# Altium PCB BopIt.PcbDoc
Units mil, origin at the board's own origin, x right, y up, seen from the top; angles counter-clockwise.
Board outline 3170 x 1700 mil, 2 copper layers (Top Layer, Bottom Layer); 13 components, 7 nets, 53 pads, 0 vias.
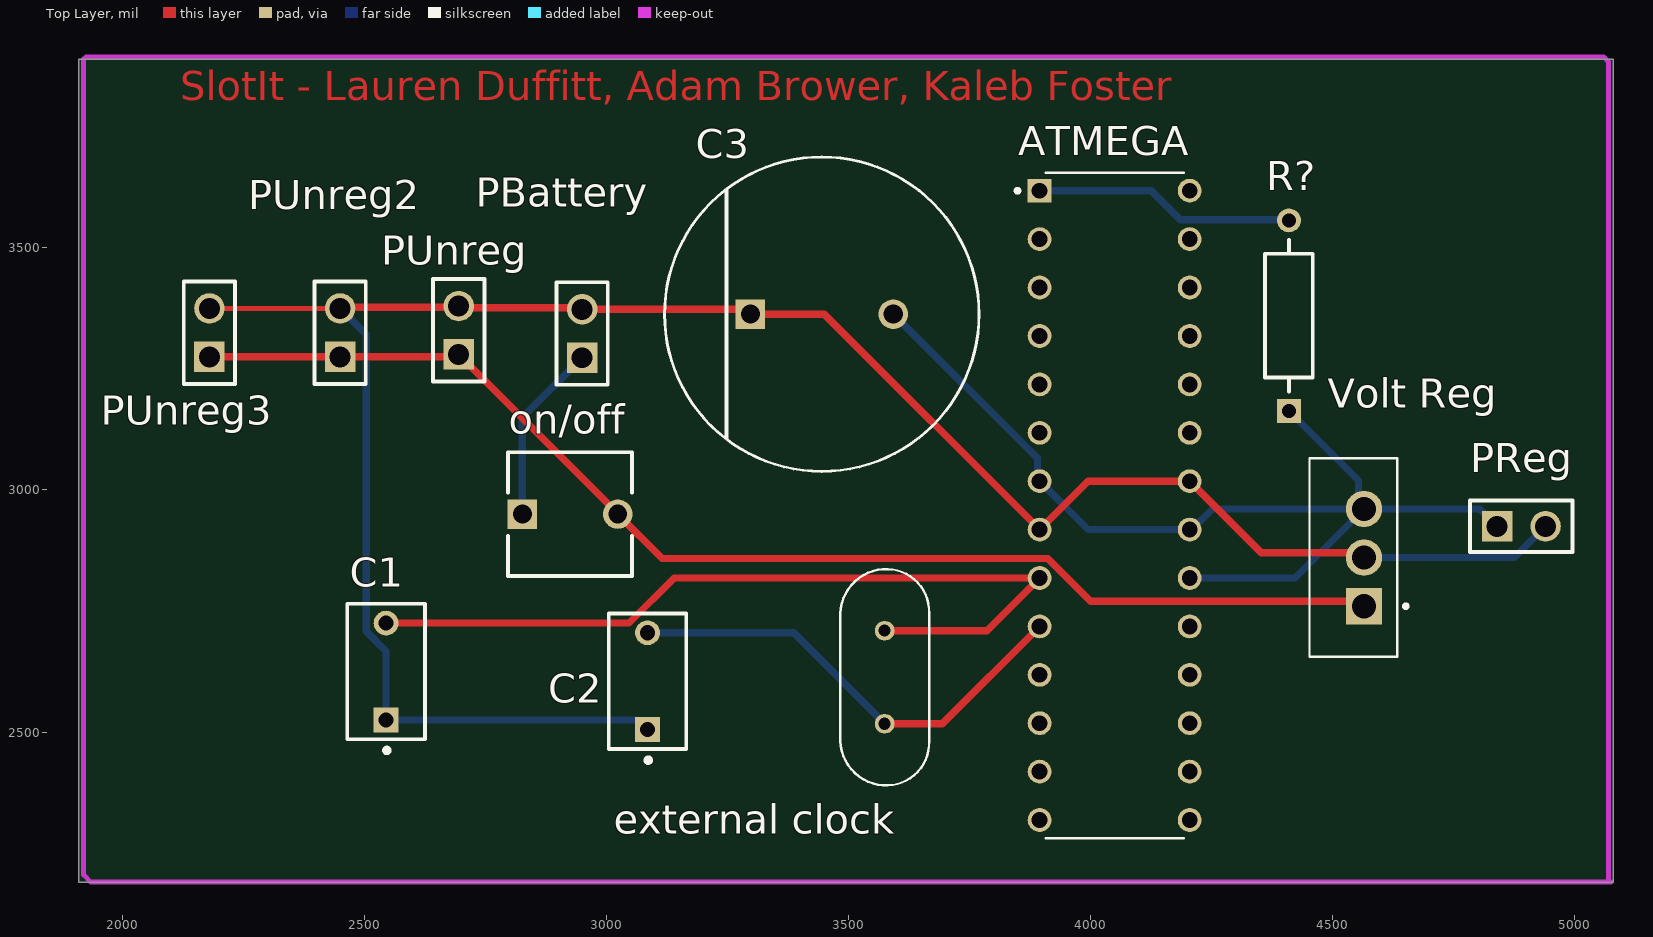
[diagram p0: Top Layer view]
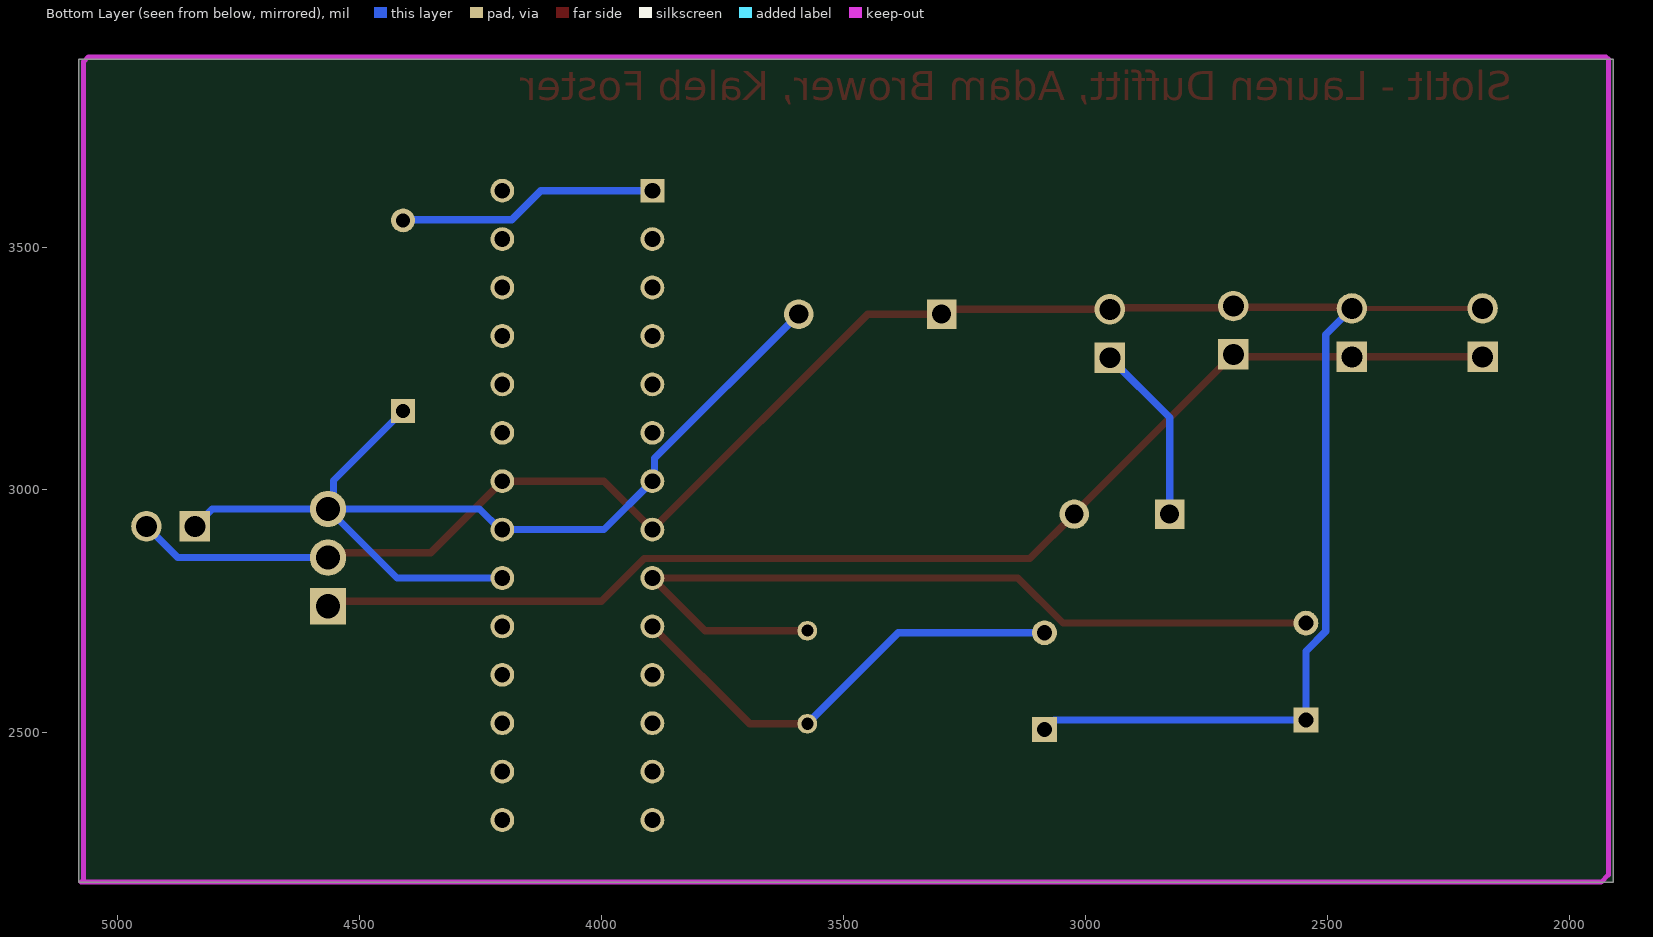
[diagram p1: Bottom Layer view, seen from below]
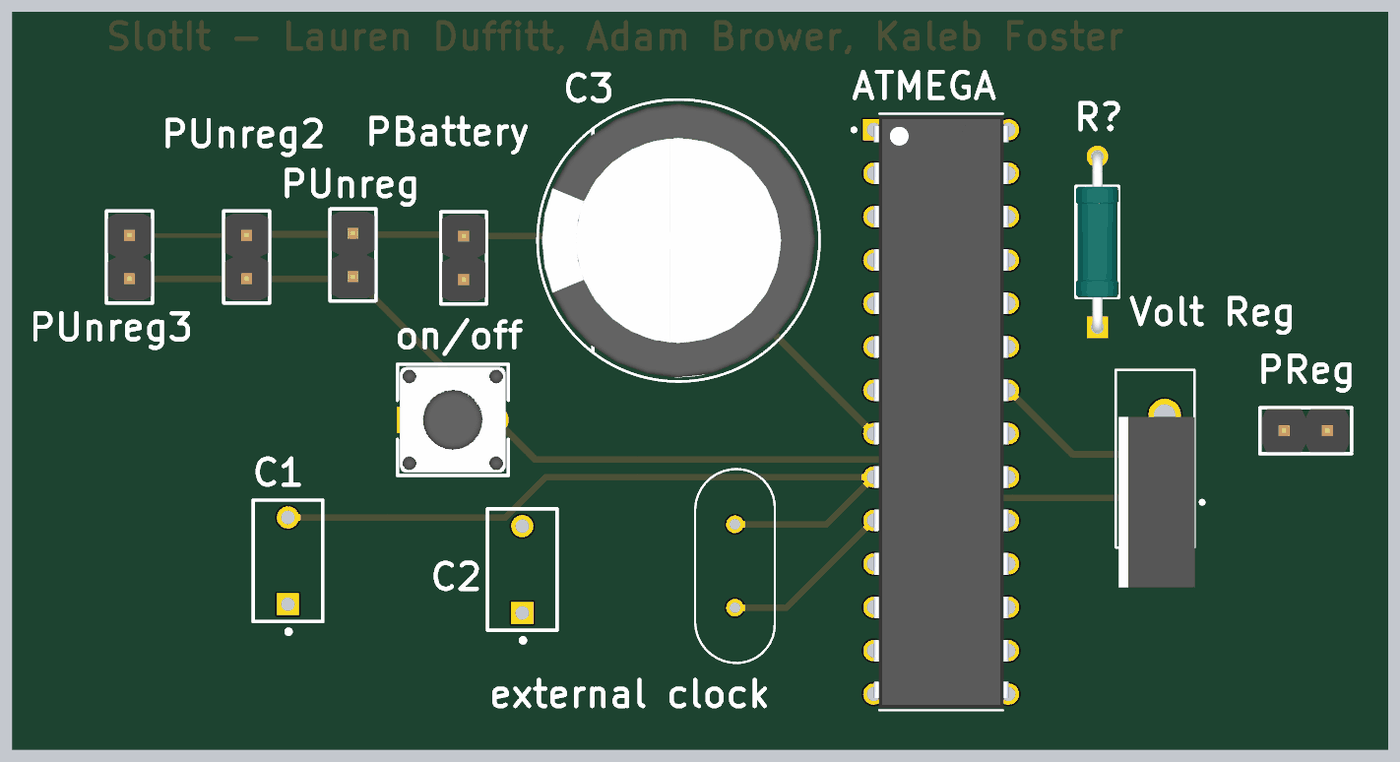
[diagram p2: 3D render of the assembled board from above, using the file's embedded part models]

## Layer stack, top to bottom
Top Solder: solder mask 0.4, Solder Resist, Dk 3.5
Top Layer: signal copper 1.4
Dielectric 1: dielectric 12.6, FR-4, Dk 4.8
Bottom Layer: signal copper 1.4
Bottom Solder: solder mask 0.4, Solder Resist, Dk 3.5

## Board outline
1910,2190 5080,2190 5080,3890 1910,3890

## Design rules (kind name [scope] priority, off if disabled: settings)
BoardOutlineClearance [All] p1: gap=7.87 ignorepadtopadclearanceinfootprint=FALSE except(15.75: Arc-SplitBarrior Arc-SplitContinuation Track-SplitBarrior Track-SplitContinuation SMDPad-SplitBarrior SMDPad-SplitContinuation THPad-SplitBarrior THPad-SplitContinuation Via-SplitBarrior Via-SplitContinuation Fill-SplitBarrior Fill-SplitContinuation Poly-SplitBarrior Poly-SplitContinuation Region-SplitBarrior Region-SplitContinuation Text-SplitBarrior Text-SplitContinuation)
Clearance "Clearance Bottom Layer" [OnLayer('Bottom Layer')] p1: gap=8 ignorepadtopadclearanceinfootprint=TRUE except(10: Arc-Text Track-Text SMDPad-Text THPad-Text Via-Text Fill-Text Poly-Text Region-Text Text-Text)
Clearance "Clearance Top Layer" [OnLayer('Top Layer')] p2: gap=8 ignorepadtopadclearanceinfootprint=TRUE except(10: Arc-Text Track-Text SMDPad-Text THPad-Text Via-Text Fill-Text Poly-Text Region-Text Text-Text)
Clearance [All] p3: gap=7.87 ignorepadtopadclearanceinfootprint=FALSE except(3.5: Arc-Arc Arc-Track Arc-SMDPad Track-Track Track-SMDPad SMDPad-SMDPad; 5: Arc-Via Track-Via SMDPad-Via THPad-Via Via-Via; 10: Arc-Text Track-Text SMDPad-Text THPad-Text Via-Text Fill-Text Poly-Text Region-Text Text-Text)
HoleSize [All] p1: absolutevalues=TRUE maxlimit=248.03 minlimit=7.87 maxpercent=80.000 minpercent=20.000
MinimumAnnularRing [All] p1: minimumring=3
MinimumSolderMaskSliver [All] p1: minsoldermaskwidth=3.94
PolygonConnect PolygonConnect_1 [All] p1: thpad.connectstyle=Relief thpad.reliefconductorwidth=20 thpad.reliefentries=4 thpad.polygonreliefangle="90 Angle" thpad.airgapwidth=10 smdpad.connectstyle=Relief smdpad.reliefconductorwidth=20 smdpad.reliefentries=4 smdpad.polygonreliefangle="90 Angle" smdpad.airgapwidth=10 via.connectstyle=Direct via.reliefconductorwidth=20 via.reliefentries=4 via.polygonreliefangle="90 Angle" via.airgapwidth=10
RoutingCorners [All] p1: cornerstyle=Round minsetback=100 maxsetback=100
RoutingVias [All] p1: holewidth=19.68 width=39.37 viastyle="Through Hole" minholewidth=7.87 minwidth=17.72 maxholewidth=39.37 maxwidth=78.74
SilkToSilkClearance [All] p1: silktosilkclearance=3.94
SilkToSolderMaskClearance [IsPad] p1: minsilkscreentomaskgap=3.94 clearancetoexposedcopper=TRUE
SolderMaskExpansion [All] p1: expansion=4 istentingtop=FALSE
Width [All] p1: maxlimit=100 minlimit=3.5 preferedwidth=15
25 further rules are at their usual default settings.

## Components (designator, comment, footprint, x,y, rotation, side; value= is the part's Value field where it differs from the comment)
ATMEGA "ATMEGA328-PU" DIP787W46P254L3467H508Q28 4050,2968.15 r0 top
C1 "C330C105M5U5TA" KEMT-C330C105M5U5TA 2545,2625 r90 top
C2 "C330C105M5U5TA" KEMT-C330C105M5U5TA 3085,2605 r90 top
C3 "EEUFC1A332S" FP-RAD-TH-D_16_0_5-L_20_2-MFG 3445,3363.15 r0 top
"external clock" "ECS-240.0001-18-1X" XTAL_ECS-200-20-1X 3575,2613.15 r90 top
on/off "FSM4JRT" FP-FSM4JRT-MFG 2925,2950 r0 top
PBattery "61300211121" 61300211121 2950,3323.15 r90 top
PReg "61300211121" 61300211121 4890,2925 r0 top
PUnreg "61300211121" 61300211121 2695,3330 r90 top
PUnreg2 "61300211121" 61300211121 2450,3325 r90 top
PUnreg3 "61300211121" 61300211121 2180,3325 r90 top
R? "MRS25000C1001FCT00" FP-MRS25-MFG 4410,3360 r90 top
"Volt Reg" "L7805CV" TO255P1040X460X1968-3 4565,2760 r90 top

## Footprints (in the part's own frame and the unit in brackets; to place one, negate y for a bottom-side part, rotate by r counter-clockwise, add the part's x,y. Pads: shape width x height; smd on the part's side, far side on the other; paste and mask are expansions set on the pad)
61300211121 [mm] "Pin Header, pitch 2.54 mm, THT, Vertical, single row, 2p"
  rect 1.6x1.6 hole 1.1: 1(-1.27,0)
  round 1.6 hole 1.1: 2(1.27,0)
  silkscreen extent -2.69,-1.35 2.69,1.35, body extent -2.54,-1.27 2.54,1.27, height 8.57
DIP787W46P254L3467H508Q28 [mm]
  rect 1.25x1.25 hole 0.83: 1(-3.937,16.51)
  round 1.25 hole 0.83: 2(-3.937,13.97) 3(-3.937,11.43) 4(-3.937,8.89) 5(-3.937,6.35) 6(-3.937,3.81) 7(-3.937,1.27) 8(-3.937,-1.27) 9(-3.937,-3.81) 10(-3.937,-6.35) 11(-3.937,-8.89) 12(-3.937,-11.43) 13(-3.937,-13.97) 14(-3.937,-16.51) 15(3.937,-16.51) 16(3.937,-13.97) 17(3.937,-11.43) 18(3.937,-8.89) 19(3.937,-6.35) 20(3.937,-3.81) 21(3.937,-1.27) 22(3.937,1.27) 23(3.937,3.81) 24(3.937,6.35) 25(3.937,8.89) 26(3.937,11.43) 27(3.937,13.97) 28(3.937,16.51)
  silkscreen extent -5.2,-17.45 3.62,17.45, body extent -3.95,-17.34 3.95,17.34, height 4.57
FP-FSM4JRT-MFG [mil]
  rect 60.65x60.65 hole 39 paste-39370.1 mask+0: 1(-98.5,0)
  round 60.65 hole 39 paste-39370.1 mask+0: 2(98.5,0)
  silkscreen extent -128,-128 128,128, body extent -133,-132 133,132, height 10
FP-MRS25-MFG [mm]
  rect 1.25x1.25 hole 0.75 paste-1000 mask+0: 1(-5,0)
  round 1.25 hole 0.75 paste-1000 mask+0: 2(5,0)
  silkscreen extent -3.98,-1.25 3.98,1.25, body extent -5.72,-1.35 5.72,1.35, height 0.25
FP-RAD-TH-D_16_0_5-L_20_2-MFG [mm]
  rect 1.55x1.55 hole 1 paste-1000 mask+0: 1(-3.75,0)
  round 1.55 hole 1 paste-1000 mask+0: 2(3.75,0)
  silkscreen extent -8.25,-8.25 8.25,8.25, body extent -8.35,-8.35 8.35,8.35, height 0.25
KEMT-C330C105M5U5TA [mm] "THD, 2-Leads, Body 7.11x4.07mm"
  rect 1.3x1.3 hole 0.8: 1(-2.54,0)
  round 1.3 hole 0.8: 2(2.54,0)
  silkscreen extent -4.27,-2.03 3.55,2.03, body extent -3.55,-2.03 3.55,2.03, height 9.14
TO255P1040X460X1968-3 [mm]
  rect 1.91x1.91 / inner round 1.91 / far side rect 1.91x1.91 hole 1.27: 1(0,0)
  round 1.91 hole 1.27: 2(2.55,0) 3(5.1,0)
  silkscreen extent -2.65,-2.29 7.75,2.86, body extent -4.98,-1.76 4.98,2.69, height 19.68
XTAL_ECS-200-20-1X [mm]
  round 1.03 hole 0.63: 1(-2.44,0) 2(2.44,0)
  silkscreen extent -5.68,-2.33 5.68,2.33

## Part data
ATMEGA: "AVR AVRÂ® ATmega Microcontroller IC 8-Bit 20MHz 32KB (16K x 16) FLASH 28-PDIP", Package="DIP-28 Microchip Technology", Availability="In Stock", Check_prices=https://www.snapeda.com/parts/ATMEGA328-PU/Microchip/view-part/?ref=eda, MF="Microchip Technology", MP=ATMEGA328-PU, Price=None, Purchase-URL=https://pricing.snapeda.com/search/part/ATMEGA328-PU/?ref=eda, SnapEDA_Link=https://www.snapeda.com/parts/ATMEGA328-PU/Microchip/view-part/?ref=snap
C1 C2: library part CMP-2000-06056-1, "Ceramic Capacitor, 1 uF, +/- 20%, 50 V, -10 to 85 degC, 2-Pin THD, RoHS, Bulk", Capacitance=1µF, Manufacturer=Kemet, Operating Temperature=10°C~85°C, Package / Case=Radial, Package Description="2-Pin Through Hole Device, Body 7.11 x 4.07 mm", Ratings=-, Standard Package=250, Temperature Coefficient=Z5U, Tolerance=±20%, Voltage - Rated=50V, Applications=GeneralPurpose, Catalog Drawings=C330(std), Category=Capacitors, Datasheet URL=http://www.kemet.com/Lists/ProductCatalog/Attachments/599/KEM_C1051_GOLDMAX_Z5U.pdf, Datasheet Version=12/2015, Family=CeramicCapacitors, Features=-, Height - Seated (Max)="0.360\"(9.14mm)", Lead Spacing="0.200\"(5.08mm)", Lead Style=Straight, Manufacturer URL=http://www.kemet.com/, Mounting Technology=ThroughHole, Mounting Type=ThroughHole, Online Catalog=GoldenMax™Series, Other Names=399-4390, Package Reference=C330C105M5U5TA, Packaging=Bulk, PCN Design/Specification=C3yySeriesGoldenMaxLeadConfiguration02/Feb/2015, Product Training Modules=CapacitorBasics-TypicalUsesforCapacitors, Series=GoldenMax™, Size / Dimension="0.300\"Lx0.150\"W(7.62mmx3.81mm)", Thickness (Max)=-
C3: library part CMP-05427-000988-1, "Aluminum Electrolytic Capacitors (Radial Lead Type) AEC-Q200 Qualified 3300uF ±20% 10V", Capacitance=3.3mF, Case/Package=Radial, ESR (Equivalent Series Resistance)=29mR, Leakage Current=3uA, Max Operating Temperature=105°C, Min Operating Temperature=-55°C, Package Quantity=100, Ripple Current=2.205A, Tolerance=20%, Voltage=10V, Construction=RADIAL, Diameter=16mm, Dissipation Factor=0.19%, Height=20mm, Height - Seated (Max)=0.787inch, Impedance=29mR, Lead Diameter=0.8mm, Lead Free="Lead Free", Lead Pitch=7.5mm, Length=20mm, Life (Hours)=5000Hour, Mount="Through Hole", Packaging=Bulk, Polarity=Polar, Radiation Hardening=No, RoHS Compliant=Yes, Series=FC, Termination=Radial, Voltage Rating=10V, Voltage Rating (DC)=10V
"external clock": "Crystals / Oscillators / Resonators 24.00014MHz 18pF", Package="HC49/U ECS International", Availability=Unavailable, MF="ECS International", MP=ECS-240.0001-18-1X, Price=None, SnapEDA_Link=https://www.snapeda.com/parts/ECS-240.0001-18-1X/ECS%20International/view-part/259232/?ref=snap
on/off: library part CMP-03407-000038-1, "SWITCH TACTILE SPST-NO 0.05A 24V", Case/Package=Radial, Contact Current Rating=50mA, Contact Resistance=100mR, Max Operating Temperature=105°C, Max Voltage Rating (DC)=12V, Min Operating Temperature=-35°C, Operating Force=1.57N, Package Quantity=10000, Actuator Diameter=3.5mm, Actuator Length=0.055inch, Actuator Material=Resin, Actuator Type=Standard, Contact Material="Copper Alloy", Contact Plating=Silver, Current Rating=50mA, Depth=6.19mm, Electrical Life=100000Cycles, Illumination Type=Non-Illuminated, Length=6.19mm, Max Current Rating=50mA, Mechanical Life=100000Cycles, Mount="Through Hole", Orientation=Straight, Packaging="Tape and Reel", Radiation Hardening=No, RoHS Compliant=Yes, Series=FSMJRT, Switch Function=Off-Mom, Switch Travel=0.25mm, Termination="PC Pins", Throw Configuration=SPST, Type=Switch, Voltage Rating (DC)=12V
PBattery PReg PUnreg PUnreg2 PUnreg3: library part CMP-1712-00002-4, "THT Vertical Pin Header WR-PHD, Pitch 2.54 mm, Single Row, 2 pins", Contact Resistance=20mOhm, Manufacturer="Wurth Elektronik", Operating Temperature=-40to105degC, Rated Current=3A, Withstanding Voltage=500VAC, Working Voltage=250VAC, Datasheet URL=https://katalog.we-online.de/em/datasheet/6130xx11121.pdf, Gender=Male, Manufacturer URL=http://www.we-online.de, Mounting Technology=THT, Orientation=Vertical, Package Reference=61300211121, Packaging=Bag, Part Number=61300211121, Pin Number=2, Pitch=2.54mm, Publisher=WurthElektronik, Row Number=Single
R?: library part CMP-02408-000051-1, "RES 1K OHM 0.6W 1% AXIAL", Case/Package=Axial, Max Operating Temperature=155°C, Max Power Dissipation=600mW, Min Operating Temperature=-55°C, Package Quantity=5000, Resistance=1kR, Resistance Tolerance=1%, Resistor Type="Metal Film", Temperature Coefficient=50ppm/°C, Voltage Rating=350V, Construction=Cylindrical, Contact Plating=Tin, Diameter=2.5mm, Lead Diameter=0.6mm, Lead Free="Lead Free", Length=6.5mm, Military Standard=Not, Mount="Through Hole", Number of Pins=2, Number of Terminations=2, Packaging="Tape and Reel", Power Rating=600mW, Radiation Hardening=No, RoHS Compliant=Yes, Series=MRS25, Technology="THIN FILM", Termination=Axial, Tolerance=1%, Voltage Rating (DC)=350V, Weight=0.00776oz, Width=2.5mm
"Volt Reg": "Linear Voltage Regulator IC Positive Fixed 1 Output 1.5A TO-220", Package="TO-220-3 ON Semiconductor", Availability="In Stock", Check_prices=https://www.snapeda.com/parts/L7805CV/STMicroelectronics/view-part/?ref=eda, MF=STMicroelectronics, MP=L7805CV, Price=None, Purchase-URL=https://pricing.snapeda.com/search/part/L7805CV/?ref=eda, SnapEDA_Link=https://www.snapeda.com/parts/L7805CV/STMicroelectronics/view-part/?ref=snap

## Nets (pads, with @x,y where several pads share a name; then routed paths per layer and width w, separated by ;. In a path a pad name is that pad's centre, name@x,y a point inside that pad or via, vN(x,y) a via of type N, cw(c..) or ccw(c..) an arc to the next point about the centre after c; other vN are vias at no path point)
NetATMEGA_1: ATMEGA.1 R?.2 | length 540.4
  Bottom Layer w15: ATMEGA.1 4125.77,3618.15 4185.67,3558.26 4408.59,3558.26 R?.2
NetATMEGA_7: "Volt Reg.3" ATMEGA.7 ATMEGA.20 ATMEGA.21 C3.2 PReg.1 R?.1 | length 2174.8
  Bottom Layer w15: C3.2 3890.53,3065.26 3890.53,3022.62 ATMEGA.7 3995,2918.15 ATMEGA.21 4209.38,2918.15 4252.02,2960.79 4565,2960.79 ; ATMEGA.20 4422.36,2818.15 4565,2960.79 ; R?.1 4553.48,3019.67 4553.48,2972.31 4565,2960.79 ; PReg.1 4804.21,2960.79 4565,2960.79
NetATMEGA_8: "Volt Reg.2" ATMEGA.8 ATMEGA.22 C1.1 C2.1 C3.1 PBattery.2 PReg.2 PUnreg2.2 PUnreg3.2 PUnreg.2 | length 4540.4
  Top Layer w10: PUnreg3.2 PUnreg2.2
  Top Layer w15: PUnreg2.2 2452.5,3377.5 2692.5,3377.5 PUnreg.2 2698.43,3376.57 2946.57,3376.57 PBattery.2 3287.36,3373.15 C3.1 3450,3363.15 ATMEGA.8 3995,3018.15 ATMEGA.22 4352.76,2870.39 4585,2870.39
  Bottom Layer w15: PUnreg2.2 2503.91,3321.09 2503.91,2707.98 2545,2666.89 C1.1 3065,2525 C2.1 ; 4565,2860.39 4875.39,2860.39 PReg.2
NetATMEGA_9: "external clock.2" ATMEGA.9 C1.2 | length 1753.7
  Top Layer w15: C1.2 3046.89,2725 3140.04,2818.15 ATMEGA.9 3786.06,2709.21 3575,2709.21
NetATMEGA_10: "external clock.1" ATMEGA.10 C2.2 | length 971.1
  Top Layer w15: 3575,2517.09 3693.94,2517.09 ATMEGA.10
  Bottom Layer w15: C2.2 3387.09,2705 3575,2517.09
Neton/off_1: on/off.1 PBattery.1 | length 374.3
  Bottom Layer w15: on/off.1 2826.5,3149.65 PBattery.1
Neton/off_2: "Volt Reg.1" on/off.2 PUnreg2.1 PUnreg3.1 PUnreg.1 | length 2619.2
  Top Layer w15: PUnreg3.1 PUnreg2.1 2690,3275 PUnreg.1 3023.5,2951.5 on/off.2 3115.24,2858.26 3911.61,2858.26 3999.87,2770 4585,2770
pads on no net: ATMEGA.2 ATMEGA.3 ATMEGA.4 ATMEGA.5 ATMEGA.6 ATMEGA.11 ATMEGA.12 ATMEGA.13 ATMEGA.14 ATMEGA.15 ATMEGA.16 ATMEGA.17 ATMEGA.18 ATMEGA.19 ATMEGA.23 ATMEGA.24 ATMEGA.25 ATMEGA.26 ATMEGA.27 ATMEGA.28

## Keep-outs
Keep-Out Layer:
  lines w10: 1920,3890 1920,2205 1935,2190 5075,2190 5070,2195 5070,3885 5060,3895 1925,3895

## Other copper
Top Layer:
  text "SlotIt - Lauren Duffitt, Adam Brower, Kaleb Foster" at 2120,3804.99 h60